# EAGLE board OOBD - BTM182-BTM222 - V5 (EAGLE 5.11)
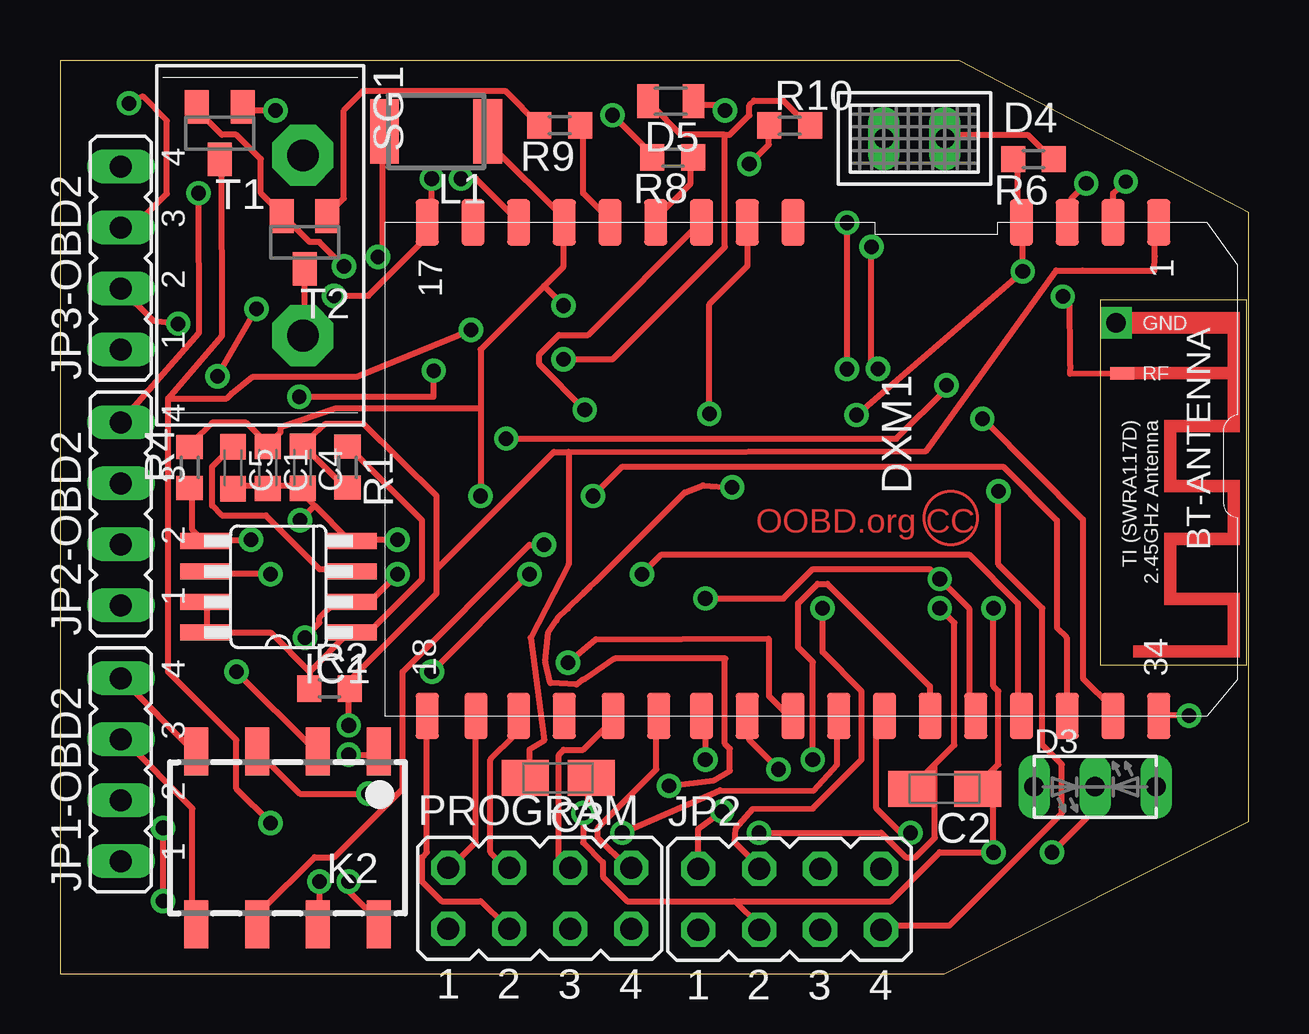
[diagram p0: board, top side]
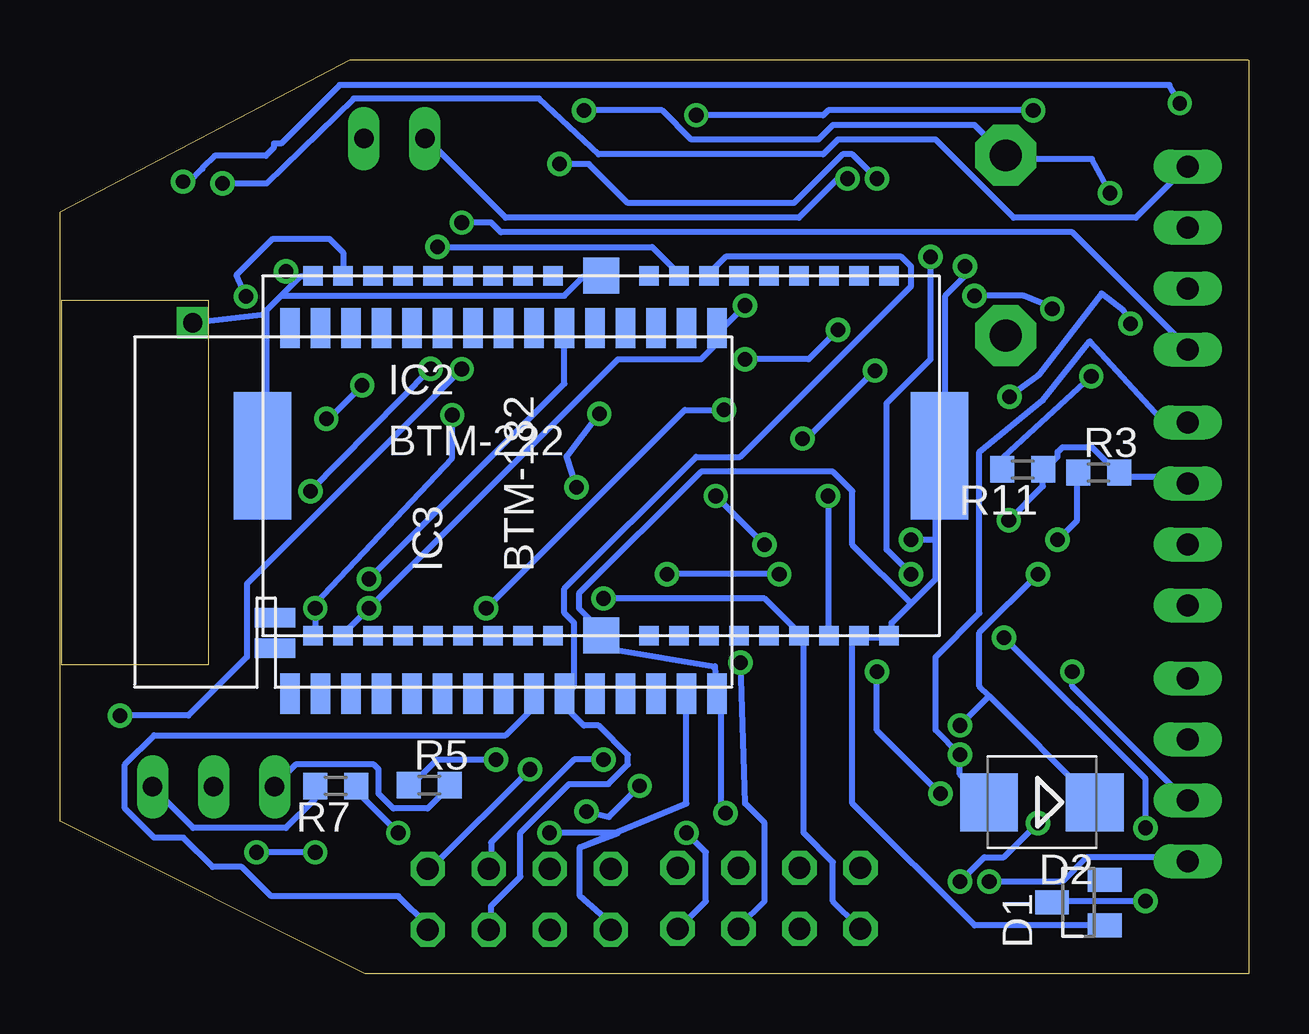
[diagram p1: board, bottom side, seen from below]

Size 49.53 x 38.1 mm. Coordinates in mm from the lower left corner, seen from the top.
Outline: 0,38.09 0,0 36.84,0 49.53,6.35
Outline: 0.01,38.1 37.46,38.1
Outline: 37.46,38.09 49.53,31.75 49.53,6.36
Copper layers (1*16): Top 0.035mm / dielectric 1.5mm / Bottom 0.035mm
Design rules "default *": minimum track width 10mil, minimum drill 24mil, track to track 8mil, track to pad 8mil, pad to pad 8mil, via to via 8mil, smd to smd 8mil, copper to edge 40mil, drill to drill 8mil, minimum pad ring 10mil, minimum via ring 8mil, stop-mask expansion 4mil, vias tented up to drill 0mil, thermal gap 10mil

## Footprints (pad centres in the part's own frame; a part is rotated, then mirrored left to right if it is on the bottom)
SWRA117D_LEFT = drill 0.8 square: GND 0.45,0.25 | smd 0.508 x 1.016: RF 2.55,0.51
C0603K = smd 1.05 x 1.08: 1 -0.875,0; 2 0.875,0
A/3216-18R = smd 1.95 x 1.5: + 1.375,0; - -1.375,0
SOT23 = smd 1 x 1.4: 1 -0.95,-1.1; 2 0.95,-1.1; 3 0,1.1
SMB = smd 2.4 x 2.4: A 2.2,0; C -2.2,0
DUOLED2X5 = drill 0.813 long: AG -2.54,0; AR 2.54,0; K 0,0
U57X32 = drill 0.813 long: A -1.27,0; K 1.27,0
MICROMELF-W = smd 0.9 x 1.4: A 0.95,0; C -0.95,0
DMX1-MINI = smd 1.93 x 0.965: 1 0,32.258; 2 0,30.353; 3 0,28.448; 4 0,26.543; 9 0,17.018; 10 0,15.113; 11 0,13.208; 12 0,11.303; 13 0,9.398; 14 0,7.493; 15 0,5.588; 16 0,3.683; 17 0,1.778; 18 20.574,1.778; 19 20.574,3.81; 20 20.574,5.588; 21 20.574,7.493; 22 20.574,9.525; 23 20.574,11.43; 24 20.574,13.208; 25 20.574,15.113; 26 20.574,17.018; 27 20.574,18.923; 28 20.574,20.828; 29 20.574,22.733; 30 20.574,24.638; 31 20.574,26.543; 32 20.574,28.448; 33 20.574,30.353; 34 20.574,32.258
SO8 = smd 0.66 x 2.032: 1 -1.905,-3.073; 2 -0.635,-3.073; 3 0.635,-3.073; 4 1.905,-3.073; 5 1.905,3.073; 6 0.635,3.073; 7 -0.635,3.073; 8 -1.905,3.073
BTM-222 = smd 0.8 x 0.8: P$1 -12.635,-7.5; P$2 -11.385,-7.5; P$3 -10.135,-7.5; P$4 -8.885,-7.5; P$5 -7.635,-7.5; P$6 -6.385,-7.5; P$7 -5.135,-7.5; P$8 -3.885,-7.5; P$9 -2.635,-7.5; P$11 1.365,-7.5; P$12 2.615,-7.5; P$13 3.865,-7.5; P$14 5.115,-7.5; P$15 6.365,-7.5; P$16 7.615,-7.5; P$17 8.865,-7.5; P$18 10.115,-7.5; P$19 11.365,-7.5; P$20 11.365,7.5; P$21 10.115,7.5; P$22 8.865,7.5; P$23 7.615,7.5; P$24 6.365,7.5; P$25 5.115,7.5; P$26 3.865,7.5; P$27 2.615,7.5; P$28 1.365,7.5; P$30 -2.635,7.5; P$31 -3.885,7.5; P$32 -5.135,7.5; P$33 -6.385,7.5; P$34 -7.635,7.5; P$35 -8.885,7.5; P$36 -10.135,7.5; P$37 -11.385,7.5; P$38 -12.635,7.5 | smd 1.5 x 1.5: P$10 -0.635,-7.5; P$29 -0.635,7.5 | smd 2.4 x 5.3: P$AGND -14.735,0; P$BGND 13.465,0
BTM-182 = smd 1.676 x 0.813: P$1 -7.62,7.62; P$2 -7.62,6.35; P$3 -7.62,5.08; P$4 -7.62,3.81; P$5 -7.62,2.54; P$6 -7.62,1.27; P$7 -7.62,0; P$8 -7.62,-1.27; P$9 -7.62,-2.54; P$10 -7.62,-3.81; P$11 -7.62,-5.08; P$12 -7.62,-6.35; P$13 -7.62,-7.62; P$14 -7.62,-8.89; P$15 -7.62,-10.16; P$16 7.62,-10.16; P$17 7.62,-8.89; P$18 7.62,-7.62; P$19 7.62,-6.35; P$20 7.62,-5.08; P$21 7.62,-3.81; P$22 7.62,-2.54; P$23 7.62,-1.27; P$24 7.62,0; P$25 7.62,1.27; P$26 7.62,2.54; P$27 7.62,3.81; P$28 7.62,5.08; P$29 7.62,6.35; P$30 7.62,7.62 | smd 0.813 x 1.676: P$31 -4.445,8.255; P$32 -5.715,8.255
JP4 = drill 0.914 long: 1 -3.81,0; 2 -1.27,0; 3 1.27,0; 4 3.81,0
JP4Q = drill 0.914 octagon: 1 -3.81,-1.27; 2 -3.81,1.27; 3 -1.27,-1.27; 4 -1.27,1.27; 5 1.27,-1.27; 6 1.27,1.27; 7 3.81,-1.27; 8 3.81,1.27
G6K-2F = smd 1 x 2: 1 -3.81,-3.6; 2 -1.27,-3.6; 3 1.27,-3.6; 4 3.81,-3.6; 5 3.81,3.6; 6 1.27,3.6; 7 -1.27,3.6; 8 -3.81,3.6
SM-NE45 = smd 1.2 x 2.7: 1 -2.15,0; 2 2.15,0
R0603 = smd 1 x 1.1: 1 -0.85,0; 2 0.85,0
B/C11S = drill 1.321 pad 2.54 octagon: 1 -3.759,0; 2 3.759,0

## Placement (x,y rotation side)
BT-ANTENNA  [SWRA117D_LEFT]  43.75,27.59 270 top
C1  1µF  [C0603K]  8.66,21.1 270 top
C2  220µF/6V  [A/3216-18R]  36.86,7.72 180 top
C3  47µ/35V  [A/3216-18R]  20.76,8.18 180 top
C4  100nF  [C0603K]  10.11,21.12 270 top
C5  470pF  [C0603K]  7.21,21.1 270 top
D1  BAS40  [SOT23]  7.1,2.98 90 bottom
D2  B140  [SMB]  8.61,7.15 180 bottom
D3  [DUOLED2X5]  43.13,7.8 0 top
D4  U57X32  [U57X32]  35.6,34.82 0 top
D5  1N4148DO35-7  [MICROMELF-W]  25.45,36.38 180 top
DXM1  [DMX1-MINI]  13.52,31.33 270 top
IC1  MC34063-SO  [SO8]  9.11,16.14 90 top
IC2  BTM-222  [BTM-222]  26.35,21.6 0 bottom
IC3  BTM-182  [BTM-182]  32.32,19.3 90 bottom
JP1-OBD2  [JP4]  2.54,8.51 90 top
JP2  [JP4Q]  30.4,3.11 0 top
JP2-OBD2  [JP4]  2.54,19.18 90 top
JP3-OBD2  [JP4]  2.54,29.84 90 top
K2  G6K-2F  [G6K-2F]  9.48,5.67 180 top
L1  220µH  [SM-NE45]  15.67,35.12 180 top
PROGRAM  [JP4Q]  19.99,3.15 0 top
R1  1R  [R0603]  11.98,21.13 270 top
R2  1R  [R0603]  11.23,11.9 0 top
R3  1K  [R0603]  6.25,20.9 0 bottom
R4  1K6  [R0603]  5.4,21.12 90 top
R5  100R  [R0603]  34.15,7.87 0 bottom
R6  120R  [R0603]  40.56,33.97 180 top
R7  100R  [R0603]  38.04,7.83 180 bottom
R8  4K7  [R0603]  25.54,34.03 180 top
R9  4K7  [R0603]  20.83,35.38 180 top
R10  180k  [R0603]  30.4,35.37 0 top
R11  47k  [R0603]  9.42,21.04 180 bottom
SG1  B/C11S  [B/C11S]  10.12,30.37 270 top
T1  BC847  [SOT23]  6.65,35.05 180 top
T2  BC847  [SOT23]  10.19,30.49 180 top

## Library data of the parts
BT-ANTENNA = ant-planar-1
C1-C5 R1-R11 = rcl
D1 D2 D5 = diode
D3 D4 = led
DXM1 = DXM
IC1 = mc34063
IC2 = btm-222
IC3 = BTM182
JP1-OBD2 JP2 JP2-OBD2 JP3-OBD2 PROGRAM = jumper
K2 = relay; MF: OMRON COMPONENTS USA; MPN: G6K-2F DC24; OC_FARNELL: 1690427; OC_NEWARK: 36K7467
L1 = inductor-neosid; OC_FARNELL: unknown; OC_NEWARK: unknown
SG1 = buzzer; OC_FARNELL: unknown; OC_NEWARK: unknown
T1 T2 = transistor

## Nets
3V3OUT: DXM1.9
+3V3: C1.1 C2.+ DXM1.14 IC2.P$2 IC2.P$17 IC3.P$14 IC3.P$16 JP2.1 L1.1 R4.2
+12V: D2.A D5.C JP2-OBD2.4 K2.1 SG1.1
A0: DXM1.18 PROGRAM.3
CS: DXM1.19 PROGRAM.2
CTS: DXM1.26 PROGRAM.5
GND: BT-ANTENNA.GND C1.2 C2.- C3.- C4.2 C5.2 D1.1 D3.K DXM1.4 IC1.4 IC2.P$1 IC2.P$10 IC2.P$18 IC2.P$19 IC2.P$29 IC2.P$38 IC2.P$AGND IC2.P$BGND IC3.P$15 JP2-OBD2.3 JP2.3 R3.2 R6.2 R11.1 T1.2 T2.2
HS_CAN-H: JP1-OBD2.3 K2.5
HS_CAN-L: JP1-OBD2.4 K2.4
K-LINE: DXM1.33 JP3-OBD2.2
L-LINE: DXM1.34 JP3-OBD2.1
MISO: DXM1.22 PROGRAM.6
MOSI: DXM1.23 PROGRAM.8
MS_CAN-H: JP1-OBD2.1 K2.7
MS_CAN-L: JP1-OBD2.2 K2.2
N$1: IC1.5 R3.1 R4.1
N$2: C5.1 IC1.3
N$3: IC2.P$27 IC3.P$9 JP2.7
N$4: D3.AR R7.2
N$5: IC1.1 IC1.7 IC1.8 R1.1 R2.1
N$6: D3.AG R5.2
N$7: D4.K R6.1
N$8: D4.A DXM1.15
N$9: DXM1.29 R5.1
N$10: DXM1.25 JP2.8
N$11: C3.+ C4.1 D2.C DXM1.1 IC1.6 R1.2 R2.2
N$12: DXM1.24 JP2.6
N$13: IC2.P$26 IC3.P$10 JP2.5
N$15: DXM1.28 R7.1
N$16: DXM1.10 JP2.2
N$17: DXM1.11 JP2.4
N$19: DXM1.17 R10.1 R11.2
N$20: R8.2 T1.1
N$21: DXM1.32 K2.6
N$22: DXM1.31 K2.3
N$23: SG1.2 T2.3
N$24: R9.2 T2.1
N$25: DXM1.12 R8.1
N$26: DXM1.13 R9.1
N$27: D5.A K2.8 R10.2 T1.3
N$29: D1.3 IC1.2 L1.2
NOT_RESET: DXM1.30 IC2.P$16 IC3.P$21 PROGRAM.1
PWM+: DXM1.2 JP3-OBD2.3
PWM-: DXM1.3 JP3-OBD2.4
RF: BT-ANTENNA.RF IC2.P$37
RTS: DXM1.27 PROGRAM.7
SCK: DXM1.20 PROGRAM.4

## Tracks (layer width: path | path; a pad name or v marks a point on that pad's centre or on a via)
+3V3  (via drill 0.61)
  Top 0.254: R4.2 5.52,22.16 6.33,22.98 7.76,22.98 8.57,22.16 C1.1 8.78,22.16 9.18,22.57 9.18,22.77 11.48,23.58 17.53,23.57 | 17.53,23.57 17.53,26.03 20.17,28.67 | 17.53,23.57 v17.53,19.92 | 20.17,28.67 20.99,29.49 20.99,31.32 DXM1.14 20.99,31.52 17.93,34.58 17.93,34.98 L1.1 | 36.45,8.73 37.27,9.55 37.27,14.63 v36.66,15.24 | 36.45,8.73 35.64,7.92 C2.+ | v29.13,5.88 34.21,5.88 35.23,4.87 35.64,4.87 36.45,5.68 36.45,8.73 | v20.99,27.86 20.17,28.67
  Bottom 0.254: v17.53,19.92 17.53,14.23 IC2.P$17 | 27.87,5.29 23.43,7.1 23.43,11.58 IC3.P$14 | 27.87,5.29 27.87,3.25 26.48,2.02 JP2.1 | IC2.P$2 37.67,14.23 v36.66,15.24 26.28,25.62 22.82,25.62 22.21,26.23 22.21,26.84 IC3.P$16 22,26.84 v20.99,27.86 | 27.87,5.29 26.28,5.88 v29.13,5.88
+12V  (via drill 0.61)
  Top 0.254: v27.7,36 27.5,36.2 26.48,36.2 D5.C | v12.03,9.14 13.25,9.14 K2.1 | v5.78,32.55 5.79,26.73 2.67,23.18 JP2-OBD2.4
  Bottom 0.254: v27.7,36 24.45,36 23.23,34.78 17.93,34.78 17.32,35.39 11.42,35.39 10.2,34.17 SG1.1 10,33.97 6.54,33.97 v5.78,32.55 | D2.A 11.02,7.31 12.03,8.33 v12.03,9.14 13.05,10.16 13.05,13.21 11.22,15.04 11.22,21.76 8.57,23.91 6.62,26.38 3.69,23.18 2.67,23.18 JP2-OBD2.4
A0
  Top 0.254: DXM1.18 15.29,10.56 15.29,5.07 15.08,4.87 15.08,3.85 15.9,3.03 17.53,3.03 18.54,2.02 PROGRAM.3
CS
  Top 0.254: DXM1.19 17.32,10.56 17.32,5.48 16.31,4.46 PROGRAM.2
CTS  (via drill 0.61)
  Top 0.254: v21.17,12.98 22.32,13.95 29.53,13.98 29.53,11.58 30.35,10.77 DXM1.26
  Bottom 0.254: v21.17,12.98 20.99,7.1 20.17,6.29 20.17,3.03 21.19,2.02 PROGRAM.5
GND  (via drill 0.61)
  Top 0.254: T1.2 5.72,36 6.74,34.98 7.35,34.98 8.37,33.97 8.37,32.54 9.18,31.73 T2.2 9.39,31.52 10.4,30.51 10.81,30.51 v11.83,29.49 | C5.2 7.35,20.33 8.57,20.33 C1.2 8.78,20.33 10,20.33 C4.2 10,20.13 10.61,19.52 | 10.61,19.52 12.03,18.09 IC1.4 12.24,18.09 v14.07,18.09 | 10.61,19.52 v10,18.91 | R6.2 39.91,33.76 39.91,31.52 DXM1.4 40.12,31.32 v40.12,29.29 v33.19,23.3 | v38.9,15.24 38.9,11.99 39.1,11.78 39.1,8.73 38.9,8.53 | 38.9,8.53 38.28,7.92 C2.- | v41.34,5.07 42.96,6.7 42.96,7.72 D3.K | 38.9,8.53 v38.9,5.07 36.66,5.07 34.62,3.03 28.11,3.03 | 22,6.7 22,6.49 21.8,6.29 21.8,5.48 22.61,4.66 22.61,4.05 23.63,3.03 28.11,3.03 | 22,6.7 22,8.12 C3.- | 28.11,3.03 29.13,2.02 JP2.3 | v21.8,6.7 22,6.7
  Bottom 0.254: JP2-OBD2.3 2.67,20.53 2.88,20.74 5.32,20.74 R3.2 5.52,20.94 6.54,21.96 7.76,21.96 7.96,21.76 7.96,21.55 8.37,21.15 R11.1 8.57,20.94 8.57,20.33 v10,18.91 | 14.07,15.45 13.05,16.47 13.05,18.09 | 14.07,15.45 14.88,14.63 14.88,14.23 IC2.P$19 15.08,14.02 16.1,14.02 IC2.P$18 16.31,14.02 16.51,13.82 16.51,7.1 11.42,2.02 6.13,2.02 D1.1 | 13.05,18.09 13.05,21.55 IC2.P$BGND 12.85,21.76 12.64,21.96 12.64,28.27 11.83,29.08 v11.83,29.49 | 13.05,18.09 v14.07,18.09 | 40.32,28.27 40.93,27.66 40.93,27.45 | 39.71,28.88 40.32,28.27 | 39.71,28.88 39.51,29.08 39.1,29.08 IC2.P$38 | 40.93,27.45 40.93,21.76 IC2.P$AGND | 40.32,28.27 28.52,28.27 27.7,29.08 27.09,29.08 IC2.P$29 | v40.12,29.29 39.71,28.88 | IC2.P$1 38.9,14.23 v38.9,15.24 38.9,15.45 33.19,21.52 v33.19,23.3 | v38.9,5.07 v41.34,5.07 | v21.8,6.7 22,6.9 22,11.58 IC3.P$15 22.21,11.78 22.21,12.19 22.24,12.83 26.48,13.54 27.1,14.02 26.89,14.02 IC2.P$10 26.89,14.23 27.91,15.24 27.91,15.85 22.82,20.94 17.32,20.94 16.51,20.13 16.51,17.89 14.07,15.45 | BT-ANTENNA.GND 40.96,27.48 40.93,27.45
HS_CAN-H
  Top 0.254: K2.5 5.52,2.22 5.52,6.9 2.67,9.75 JP1-OBD2.3
HS_CAN-L
  Top 0.254: K2.4 5.52,9.34 2.67,12.19 JP1-OBD2.4
K-LINE  (via drill 0.6)
  Top 0.254: DXM1.33 43.88,11.1 42.62,12.32 42.62,18.95 38.54,23.06 38.51,23.06 v38.43,23.14 | v36.94,24.54 36.94,24.41 34.85,22.31 v18.59,22.31 | v15.57,25.15 15.57,24.06 v9.97,24.06 | v4.92,27.1 3.88,27.23 JP3-OBD2.2
  Bottom 0.254: v38.43,23.14 38.34,23.14 v36.94,24.54 | v18.59,22.31 18.41,22.31 v15.57,25.15 | v9.97,24.06 8.75,24.97 6.13,28.36 5.21,27.65 v4.92,27.1
L-LINE  (via drill 0.61)
  Top 0.254: v47.03,10.77 45.81,10.77 DXM1.34 | v32.79,31.32 v32.79,25.22
  Bottom 0.254: v47.03,10.77 44.19,10.77 41.74,13.21 41.74,16.26 v32.79,25.22 | v32.79,31.32 31.57,31.32 31.16,30.91 7.35,30.91 2.67,26.23 JP3-OBD2.1
MISO
  Top 0.254: DXM1.22 23.02,10.56 21.8,9.34 20.99,9.34 20.78,9.14 20.78,4.87 21.19,4.46 PROGRAM.6
MOSI
  Top 0.254: DXM1.23 24.85,10.56 24.85,8.53 22.41,6.09 22.41,5.68 23.63,4.46 PROGRAM.8
MS_CAN-H  (via drill 0.61)
  Top 0.254: v10.81,3.85 10.81,2.22 K2.7
  Bottom 0.254: v10.81,3.85 7.76,3.85 6.74,4.87 2.67,4.87 JP1-OBD2.1
MS_CAN-L  (via drill 0.61)
  Top 0.254: v7.35,12.6 10.61,9.34 K2.2
  Bottom 0.254: v7.35,12.6 7.35,11.99 2.67,7.31 JP1-OBD2.2
N$1  (via drill 0.61)
  Top 0.254: R4.1 5.52,20.13 5.52,18.5 5.93,18.09 IC1.5 6.13,18.09 v7.96,18.09
  Bottom 0.254: v7.96,18.09 7.15,18.91 7.15,20.74 R3.1
N$2
  Top 0.254: C5.1 7.15,21.96 6.33,21.15 6.33,19.52 6.74,19.11 8.57,19.11 10.81,16.87 12.03,16.87 IC1.3
N$3  (via drill 0.61)
  Top 0.254: v33.81,30.3 33.81,25.42 v34.09,25.23 | v39.1,20.13 39.1,17.08 40.93,15.24 40.93,9.55 41.74,8.73 41.74,6.7 37.06,2.02 34.21,2.02 JP2.7
  Bottom 0.254: v33.81,30.3 24.85,30.3 23.84,29.29 IC2.P$27 | v39.1,20.13 v34.09,25.23 | IC3.P$9 29.94,11.58 29.94,10.97 30.96,9.95 45.61,9.95 46.83,8.73 46.83,6.9 45.61,5.68 44.39,5.68 43.17,4.46 41.95,4.46 40.73,3.24 35.44,3.24 34.21,2.02 JP2.7
N$4
  Bottom 0.254: R7.2 38.9,7.72 38.9,7.31 40.12,6.09 43.98,6.09 45.61,7.72 D3.AR
N$5
  Top 0.254: IC1.7 6.13,15.45 6.13,14.43 IC1.8 6.13,14.23 8.78,14.23 10.4,12.6 | 10.4,12.6 10.4,11.99 R2.1 | 10.4,12.6 12.03,14.23 IC1.1 12.24,14.43 13.05,14.43 15.08,16.47 15.08,18.91 12.03,21.96 R1.1
N$6
  Bottom 0.254: R5.2 33.4,7.72 34.21,6.9 35.64,6.9 36.25,7.51 36.25,8.53 36.45,8.73 39.71,8.73 40.52,7.92 D3.AG
N$7
  Top 0.254: R6.1 41.34,33.97 40.32,34.98 37.06,34.98 D4.K
N$8  (via drill 0.61)
  Top 0.254: v16.71,33.15 17.32,33.15 18.95,31.52 DXM1.15
  Bottom 0.254: v16.71,33.15 17.12,33.15 18.75,31.52 30.96,31.52 34.21,34.78 D4.A
N$9  (via drill 0.61)
  Top 0.254: v31.36,8.94 31.36,13.01 30.75,13.62 30.75,15.45 31.57,16.26 31.98,16.26 36.25,11.99 36.25,10.77 DXM1.29
  Bottom 0.254: v31.36,8.94 33.81,8.94 34.83,7.92 R5.1
N$10  (via drill 0.61)
  Top 0.254: v29.94,8.53 28.72,9.75 28.72,10.56 DXM1.25
  Bottom 0.254: v29.94,8.53 34.01,4.46 JP2.8
N$11  (via drill 0.61)
  Top 0.254: v8.78,16.67 6.13,16.67 IC1.6 | R1.2 11.83,20.33 10.2,21.96 C4.1 10.2,22.16 11.03,22.91 12.66,22.91 15.7,19.92 15.7,16.87 | 15.7,16.87 15.7,15.85 12.24,12.4 12.24,11.99 R2.2 12.03,11.78 v12.03,10.36 | 21.19,21.76 20.58,21.76 15.7,16.87 | 21.19,21.76 36.1,21.8 41.51,29.33 42.61,29.32 45.6,29.33 45.62,29.92 45.61,31.32 DXM1.1 | 21.19,21.76 21.19,17.08 19.61,14.01 20.17,9.72 19.56,9.34 19.56,8.33 C3.+
  Bottom 0.254: v8.78,16.67 11.22,14.23 11.22,11.99 10.81,11.58 | 10.81,11.58 6.54,7.31 D2.C | 10.81,11.58 v12.03,10.36
N$12  (via drill 0.61)
  Top 0.254: v26.89,8.94 26.89,10.56 DXM1.24
  Bottom 0.254: v26.89,8.94 28.11,8.94 31.57,5.48 31.57,4.46 JP2.6
N$13
  Bottom 0.254: IC2.P$26 22.41,29.29 21.8,29.9 14.47,29.9 14.07,29.49 14.07,28.67 21.19,21.55 23.02,21.55 28.52,16.06 28.52,15.04 28.11,14.63 28.11,11.99 28.31,11.78 IC3.P$10 28.31,11.58 28.31,10.97 27.7,10.36 27.09,10.36 25.87,9.14 25.87,8.73 26.68,7.92 28.31,7.92 30.35,5.88 30.35,4.05 31.57,2.83 31.57,2.02 JP2.5
N$15  (via drill 0.61)
  Top 0.254: v35.44,5.88 35.03,5.88 34.01,6.9 34.01,10.36 34.21,10.56 DXM1.28
  Bottom 0.254: v35.44,5.88 37.06,7.51 37.06,7.72 R7.1
N$16  (via drill 0.6)
  Top 0.254: JP2.2 26.59,6.04 v27.59,6.77 | v25.38,7.84 27.23,8.06 27.92,8.47 27.92,9.38 27.71,9.59 27.69,12.76 27.7,13.13 27.61,13.14 27.72,13.15 23.12,13.15 21.88,12.31 21.73,12.23 21.53,12.06 20.43,12.12 20.23,13.02 20.33,14.23 20.68,14.73 20.73,14.83 21.16,15.23 21.77,15.82 21.84,15.91 22.05,16.11 22.31,16.35 22.45,16.49 26.03,20.07 26.79,20.37 v28.01,20.29 | v27.06,23.35 27.06,27.92 28.65,29.52 28.65,31.31 DXM1.10
  Bottom 0.254: v27.59,6.77 26.66,6.54 v25.38,7.84 | v28.01,20.29 28.42,21.58 v27.06,23.35
N$17  (via drill 0.61)
  Top 0.254: v21.86,23.52 19.97,25.42 19.97,25.83 20.78,26.64 22,26.64 26.68,31.32 DXM1.11 | v31.77,15.24 31.77,13.41 33.4,11.78 33.4,8.94 31.36,6.9 28.86,6.87 28.16,6.06 28.11,5.48 29.13,4.46 JP2.4
  Bottom 0.254: v21.86,23.52 23.49,23.52 v31.77,15.24
N$19  (via drill 0.61)
  Top 0.254: v6.56,24.91 v8.19,27.73 | v11.42,28.27 12.85,28.27 15.29,30.71 15.29,31.32 DXM1.17 15.49,31.52 v15.49,33.15 | v28.72,33.76 29.53,34.58 29.53,35.19 R10.1
  Bottom 0.254: v6.56,24.91 10.2,21.55 10.2,21.15 R11.2 | v8.19,27.73 8.22,27.8 9.39,28.27 v11.42,28.27 | v28.72,33.76 27.5,33.76 25.87,32.14 18.95,32.14 16.92,34.17 16.51,34.17 v15.49,33.15
N$20  (via drill 0.61)
  Top 0.254: v23.02,35.8 24.65,34.17 R8.2 | v8.98,36 7.76,36 T1.1
  Bottom 0.254: v23.02,35.8 17.73,35.8 17.53,36 v8.98,36
N$21  (via drill 0.61)
  Top 0.254: v22.21,19.92 23.43,21.15 39.3,21.15 41.54,18.91 41.54,14.43 41.95,14.02 41.95,10.77 DXM1.32 | v20.17,17.89 19.56,17.89 14.27,12.6 14.27,7.72 11.42,4.87 10.61,4.87 8.37,2.63 8.37,2.22 K2.6
  Bottom 0.254: v20.17,17.89 v22.21,19.92
N$22  (via drill 0.61)
  Top 0.254: v24.24,16.67 25.06,17.48 37.88,17.48 39.91,15.45 39.91,10.77 DXM1.31 | v15.49,12.6 v19.56,16.67 | v12.85,7.51 10,7.51 8.37,9.14 K2.3
  Bottom 0.254: v19.56,16.67 v24.24,16.67 | v15.49,12.6 15.49,10.16 v12.85,7.51
N$23
  Top 0.254: T2.3 10.2,29.29 10.2,26.64 SG1.2
N$24
  Top 0.254: R9.2 19.97,35.39 18.54,36.81 12.64,36.81 11.83,36 11.83,32.34 11.22,31.73 T2.1
N$25
  Top 0.254: R8.1 26.28,33.97 26.28,32.95 24.85,31.52 DXM1.12
N$26
  Top 0.254: R9.1 21.8,35.19 21.8,32.54 22.82,31.52 DXM1.13
N$27  (via drill 0.61)
  Top 0.254: 27.7,34.98 25.87,34.98 24.65,36.2 D5.A | 27.7,34.98 27.91,34.98 28.72,35.8 28.72,36.2 28.92,36.41 30.14,36.41 31.16,35.39 R10.2 | 4.5,23.99 6.75,26.61 6.74,33.76 T1.3 | 4.5,23.99 4.5,12.6 7.35,9.75 7.35,7.72 v8.78,6.29 | v12.03,3.85 12.03,3.44 13.25,2.22 K2.8 | 27.7,34.98 27.7,30.3 23.02,25.62 v20.99,25.62 | v17.12,26.84 12.36,24.9 8.04,24.89 7.15,24.2 6.94,23.99 4.5,23.99
  Bottom 0.254: v8.78,6.29 10.2,4.87 11.02,4.87 v12.03,3.85 | v20.99,25.62 18.34,25.62 v17.12,26.84
N$29  (via drill 0.61)
  Top 0.254: v4.3,3.03 v4.3,6.09 | v10.2,14.02 10.81,14.63 10.81,14.84 11.42,15.45 12.03,15.45 IC1.2 12.24,15.65 13.05,15.65 v14.07,16.67 | v13.25,29.9 13.46,30.1 13.46,34.98 L1.2
  Bottom 0.254: v4.3,3.03 8.17,3.03 D1.3 | v4.3,6.09 4.3,8.12 v10.2,14.02 | v13.25,29.9 13.25,25.62 15.08,23.79 15.08,17.69 v14.07,16.67
NOT_RESET  (via drill 0.61)
  Top 0.254: DXM1.30 38.08,10.77 37.88,10.97 37.88,15.24 v36.66,16.47 36.25,16.87 31.36,16.87 30.14,15.65 v26.89,15.65
  Bottom 0.254: PROGRAM.1 16.31,2.02 17.32,3.03 17.32,4.66 18.54,5.88 18.54,14.02 IC2.P$16 18.75,14.23 20.17,15.65 v26.89,15.65 | v36.66,16.47 28.52,24.61 28.52,26.84 IC3.P$21
PWM+  (via drill 0.6)
  Top 0.254: DXM1.2 43.88,32.53 v44.41,33.03 | v2.87,36.29 3.44,36.58 4.46,35.57 4.46,32.52 3.1,31.16 2.59,31.16 JP3-OBD2.3
  Bottom 0.254: v44.41,33.03 44.17,32.99 43.59,33.57 43.59,33.6 43.09,34.11 40.96,34.11 40.62,34.45 40.62,34.62 40.32,34.62 37.88,37.06 3.31,37.06 v2.87,36.29
PWM-  (via drill 0.61)
  Top 0.254: v42.76,32.95 42.15,32.34 42.15,31.52 DXM1.3
  Bottom 0.254: v42.76,32.95 40.93,32.95 37.3,36.49 29.57,36.49 27.09,34.17 17.73,34.17 17.12,34.78 13.05,34.78 9.79,31.52 4.71,31.52 2.67,33.56 JP3-OBD2.4
RF  (via drill 0.6)
  Top 0.254: BT-ANTENNA.RF 42.08,25.02 42.09,25.37 42.07,28.39 v41.79,28.24
  Bottom 0.254: v41.79,28.24 42.19,29.12 40.66,30.65 38.31,30.65 37.73,30.08 IC2.P$37
RTS  (via drill 0.61)
  Top 0.254: v23.43,5.88 27.49,7.66 31.39,7.63 32.38,8.73 32.38,10.56 DXM1.27
  Bottom 0.254: v23.43,5.88 22.61,5.07 22.61,3.03 23.63,2.02 PROGRAM.7
SCK
  Top 0.254: DXM1.20 18.95,10.56 18.95,9.95 17.93,8.94 17.93,5.07 18.54,4.46 PROGRAM.4
(copper drawn outside any net)
  shapes: Top circle x1

## Text on the board
Top: OOBD.org CC